# Altium PCB PCB1.PcbDoc
Units mm, origin at the board's own origin, x right, y up, seen from the top; angles counter-clockwise.
Board outline 118.33 x 69.3 mm, 2 copper layers (Top Layer, Bottom Layer); 36 components, 51 nets, 160 pads, 7 vias.
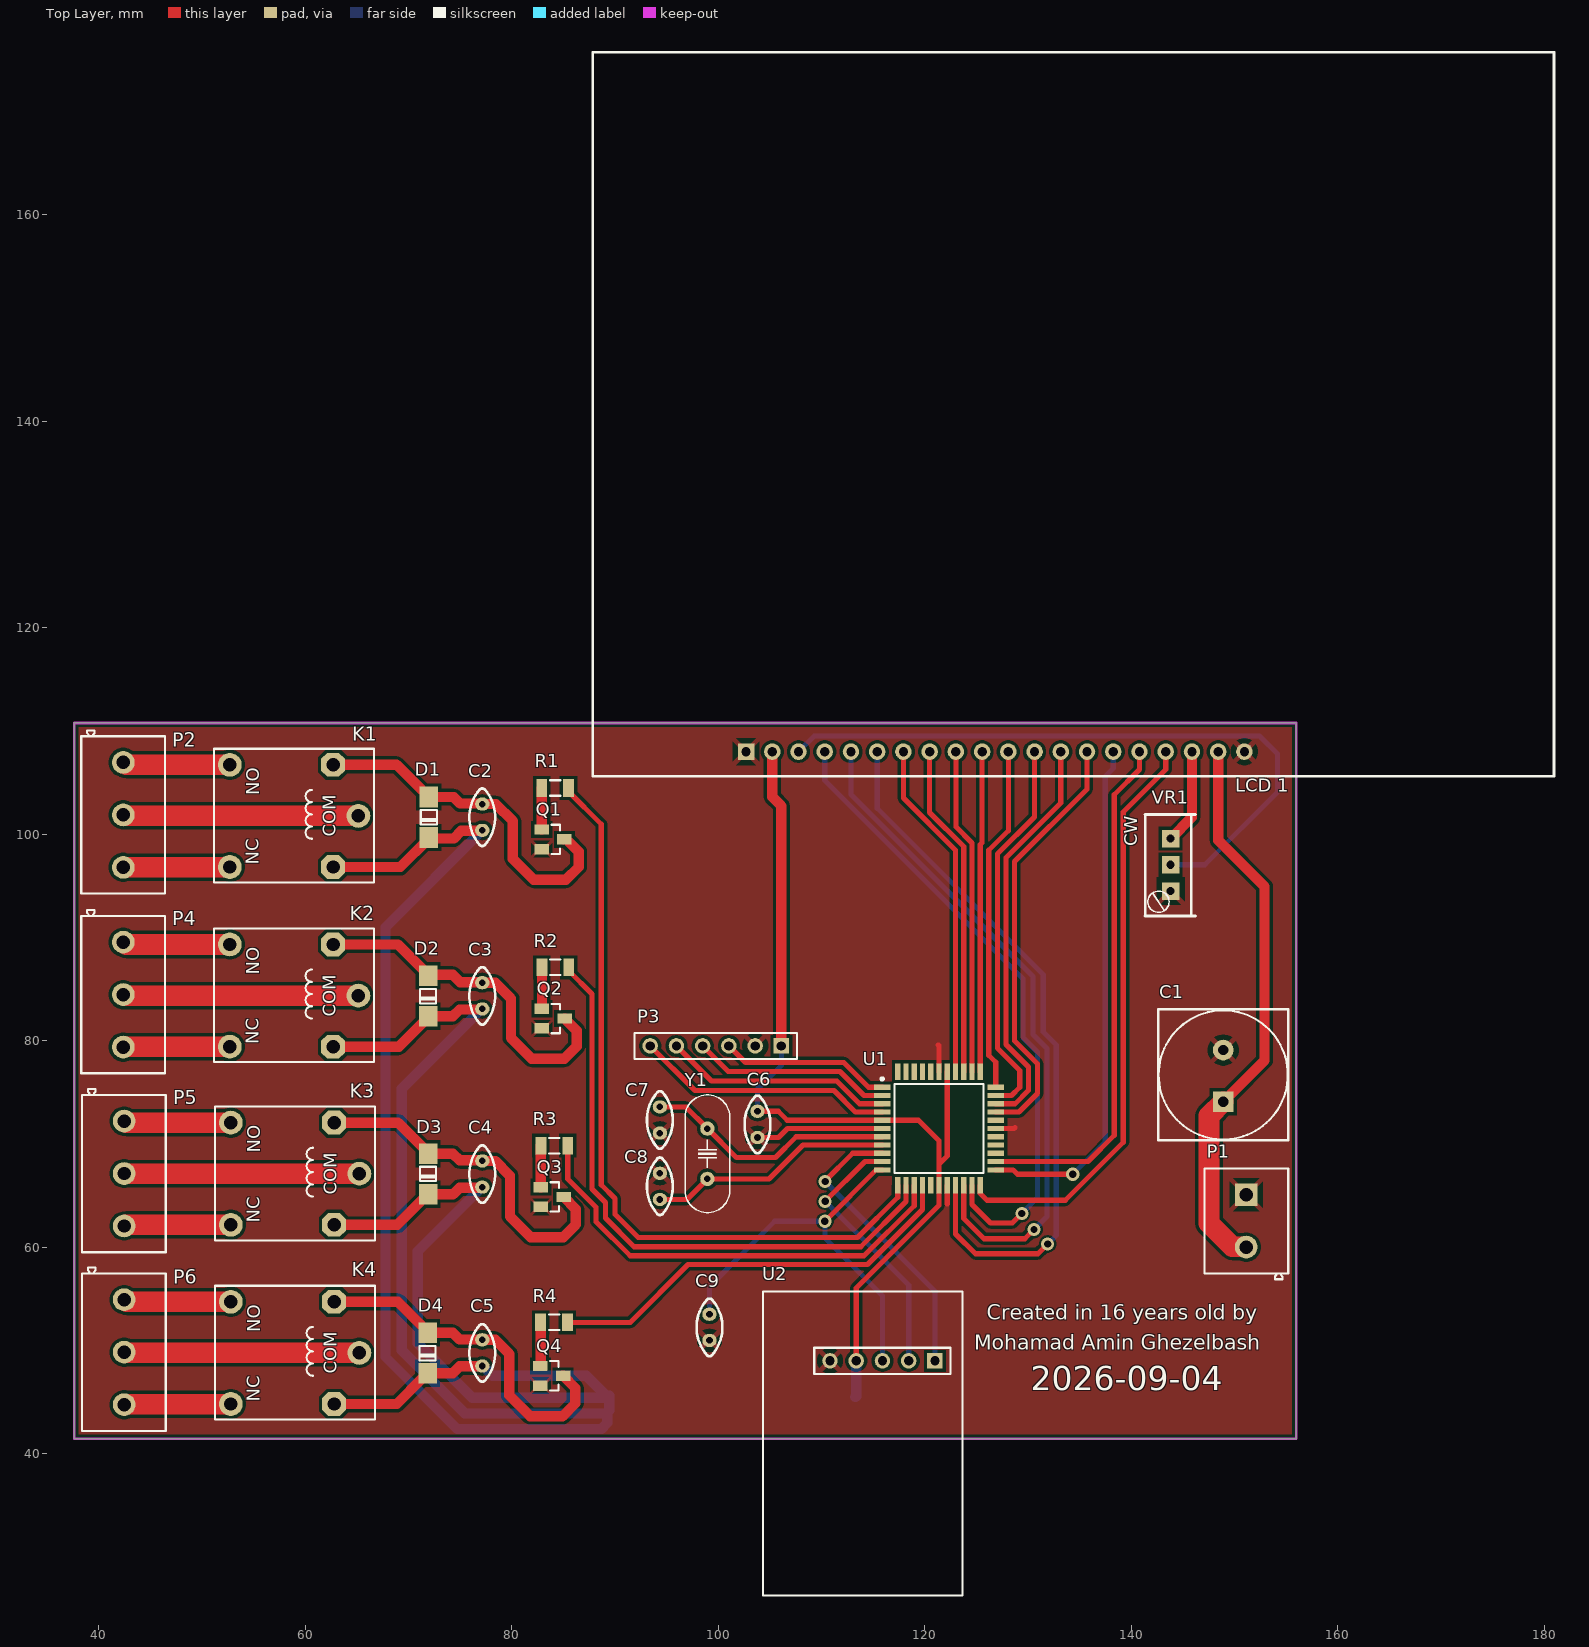
[diagram p0: Top Layer view]
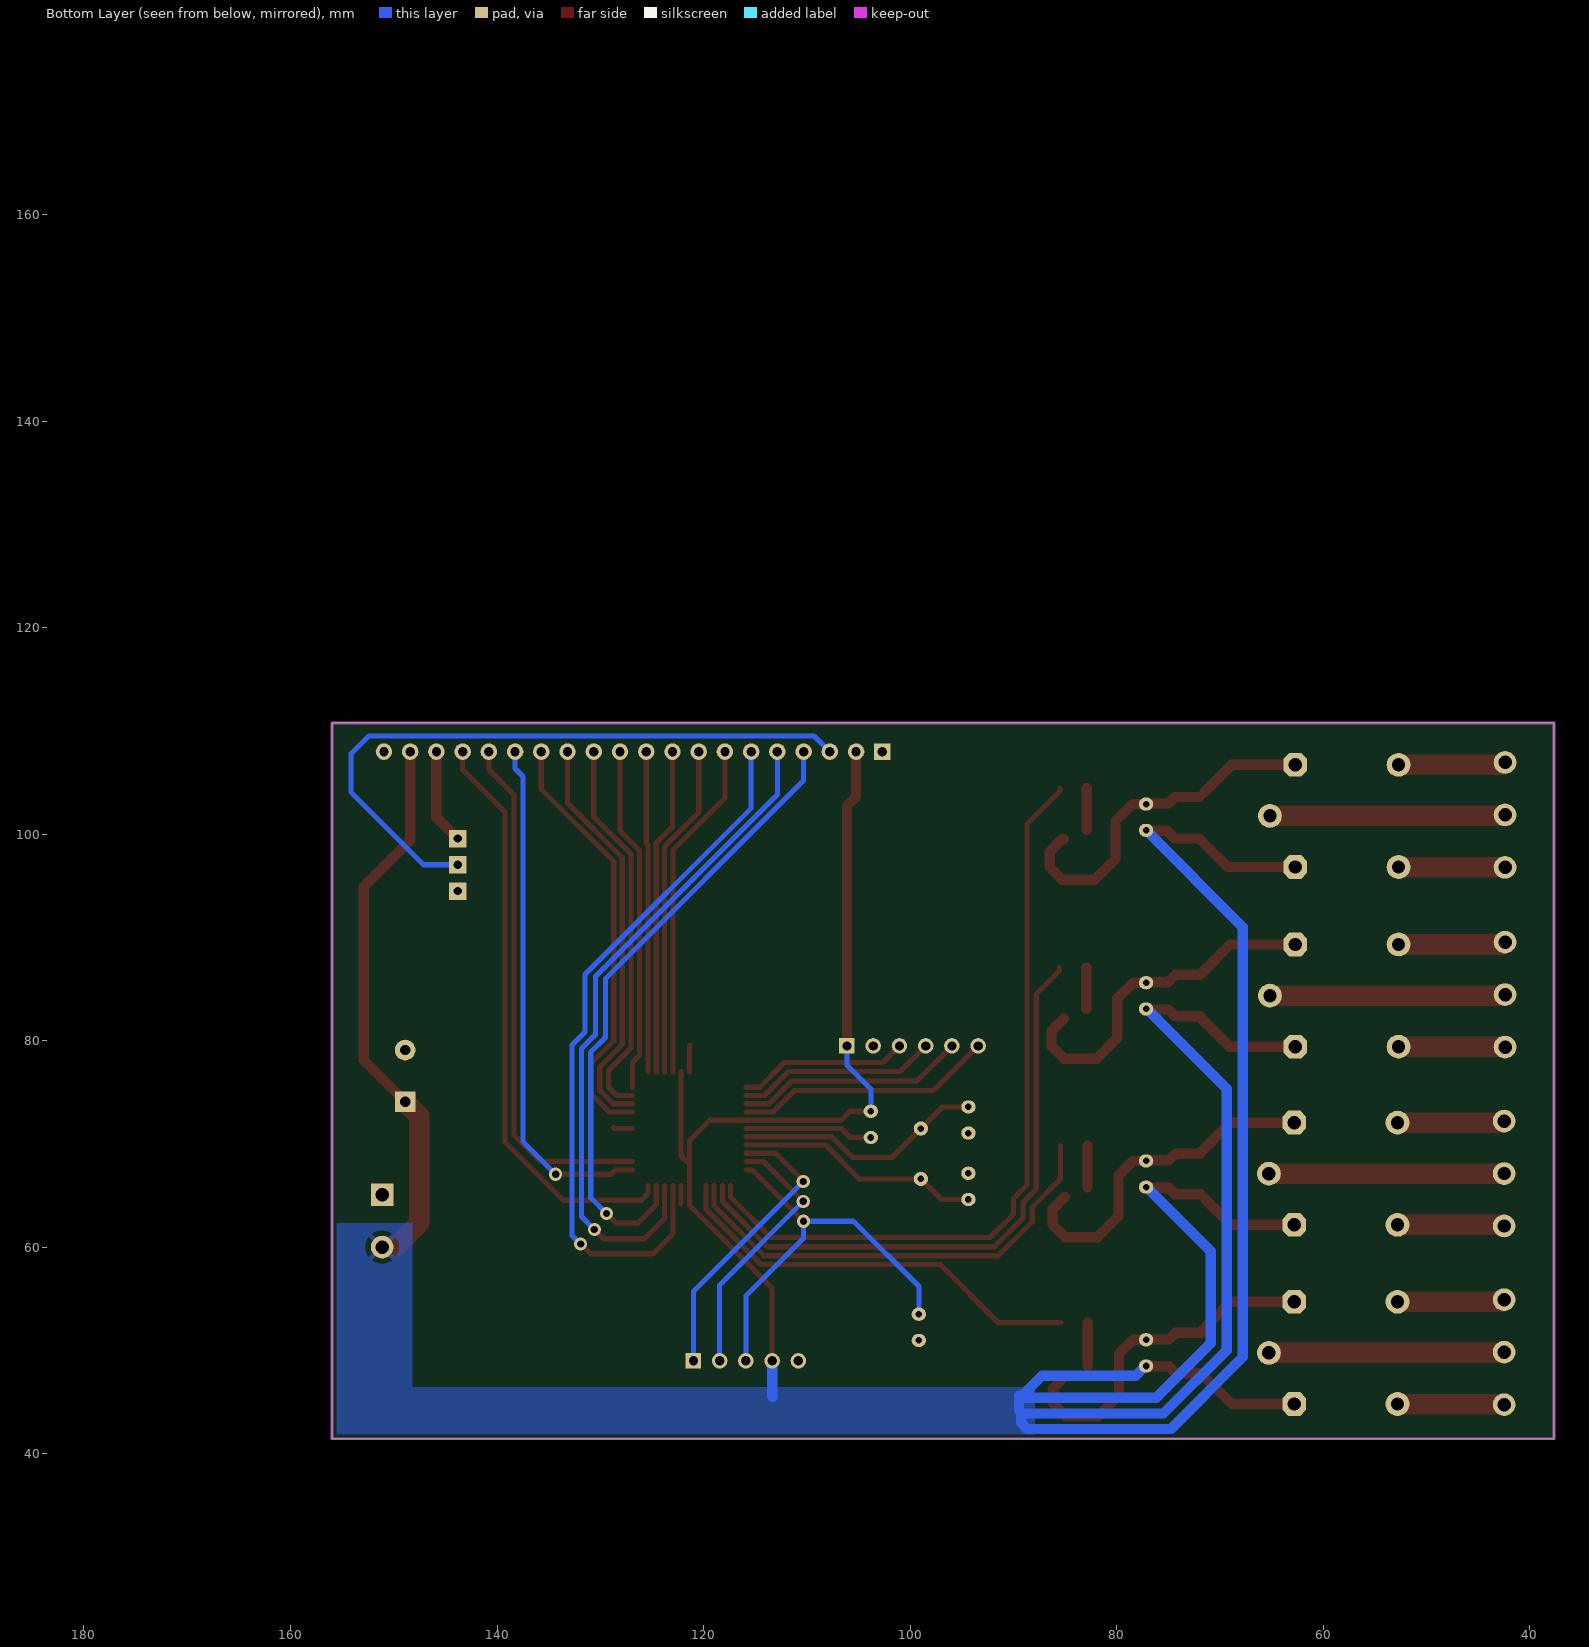
[diagram p1: Bottom Layer view, seen from below]

## Layer stack, top to bottom
Top Solder: solder mask 0.0102, Solder Resist, Dk 3.5
Top Layer: signal copper 0.0356
Dielectric 1: dielectric 0.32, FR-4, Dk 4.8
Bottom Layer: signal copper 0.0356
Bottom Solder: solder mask 0.0102, Solder Resist, Dk 3.5

## Board outline
37.65,41.475 37.65,110.775 155.975,110.775 155.975,41.475

## Design rules (kind name [scope] priority, off if disabled: settings)
Clearance [All] p1: gap=0.02 ignorepadtopadclearanceinfootprint=TRUE except(0.2: Via-Fill Via-Poly Via-Region; 0.3: Arc-Fill Arc-Poly Arc-Region Track-Fill Track-Poly Track-Region SMDPad-Fill SMDPad-Poly SMDPad-Region THPad-Fill THPad-Poly THPad-Region Fill-Fill Fill-Poly Fill-Region Poly-Poly Poly-Region Region-Region)
PolygonConnect [All] p1: thpad.connectstyle=Relief thpad.reliefconductorwidth=0.5 thpad.reliefentries=4 thpad.polygonreliefangle="45 Angle" thpad.airgapwidth=0.5 smdpad.connectstyle=Relief smdpad.reliefconductorwidth=0.3 smdpad.reliefentries=4 smdpad.polygonreliefangle="45 Angle" smdpad.airgapwidth=0.3 via.connectstyle=Relief via.reliefconductorwidth=0.3 via.reliefentries=4 via.polygonreliefangle="45 Angle" via.airgapwidth=0.3
RoutingVias [All] p1: holewidth=0.711 width=1.27 viastyle="Through Hole" minholewidth=0.711 minwidth=1.27 maxholewidth=0.711 maxwidth=1.27
SolderMaskExpansion [All] p1: expansion=0.102 istentingtop=FALSE
Width [All] p1: maxlimit=2 minlimit=0.5 preferedwidth=1
30 further rules are at their usual default settings.

## Classes and differential pairs
component class Sheet1: C1 C2 C3 C4 C5 C6 C7 C8 C9 D1 D2 D3 D4 K1 K2 K3 K4 "LCD 1" P1 P2 P3 P4 P5 P6 Q1 Q2 Q3 Q4 R1 R2 R3 U2 VR1 Y1

## Components (designator, comment, footprint, x,y, rotation, side; value= is the part's Value field where it differs from the comment)
C1 "10uF" "Cap 12.5x25-5" 154.663,66.957 r90 top
C2 "100nF" "Cap - 100nF" 77.15,101.65 r270 top
C3 "100nF" "Cap - 100nF" 77.15,84.35 r270 top
C4 "100nF" "Cap - 100nF" 77.15,67.095 r270 top
C5 "100nF" "Cap - 100nF" 77.15,49.775 r270 top
C6 "100nF" "Cap - 100nF" 103.8,71.9 r90 top
C7 "100nF" "Cap - 100nF" 94.35,72.33 r270 top
C8 "100nF" "Cap - 100nF" 94.35,65.9 r90 top
C9 "100nF" "Cap - 100nF" 99.15,52.25 r270 top
D1 "1n4007" "Diode 1N4007 SMD" 69.523,106.648 r270 top
D2 "1n4007" "Diode 1N4007 SMD" 69.448,89.343 r270 top
D3 "1n4007" "Diode 1N4007 SMD" 69.448,72.118 r270 top
D4 "1n4007" "Diode 1N4007 SMD" 69.398,54.773 r270 top
K1 "Relay 5V" "Relay 15.40x12.10x13.10" 220.79,-86.674 r90 top
K2 "Relay 5V" "Relay 15.40x12.10x13.10" 220.79,-104.074 r90 top
K3 "Relay 5V" "Relay 15.40x12.10x13.10" 220.89,-121.324 r90 top
K4 "Relay 5V" "Relay 15.40x12.10x13.10" 220.89,-138.674 r90 top
"LCD 1" "GLCD?" "LCD 128x64 graphic" 136.349,163.265 r0 top
P1 "2 PIN Phoenix MKDSN" "2 PIN Phoenix MKDSN" 151.76,60.147 r90 top
P2 "3 PIN Phoenix MKDSN" "3 PIN Phoenix MKDSN" 43.275,102.125 r270 top
P3 "M-Header 6" "M-Header 6" 100.141,79.627 r180 top
P4 "3 PIN Phoenix MKDSN" "3 PIN Phoenix MKDSN" 43.275,84.725 r270 top
P5 "3 PIN Phoenix MKDSN" "3 PIN Phoenix MKDSN" 43.364,67.399 r270 top
P6 "3 PIN Phoenix MKDSN" "3 PIN Phoenix MKDSN" 43.364,50.099 r270 top
Q1 "BC547" "BC547 SMD SOT-23" 83.8,99.5 r270 top
Q2 "BC547" "BC547 SMD SOT-23" 83.825,82.15 r270 top
Q3 "BC547" "BC547 SMD SOT-23" 83.725,64.875 r270 top
Q4 "BC547" "BC547 SMD SOT-23" 83.675,47.55 r270 top
R1 "Resistor" "Resistor_SMD_1206 (3216)" 84.2,104.475 r0 top value=2.2K
R2 "Resistor" "Resistor_SMD_1206 (3216)" 84.225,87.1 r0 top value=2.2K
R3 "Resistor" "Resistor_SMD_1206 (3216)" 84.125,69.85 r0 top value=2.2K
R4 "Resistor" "Resistor_SMD_1206 (3216)" 84.1,52.725 r0 top value=2.2K
U1 "ATmega32-16AC" 44A 121.375,71.5 r0 top
U2 "rotary encoder" "rotary encoder" 115.9,48.75 r0 top
VR1 "Multi Turn" "Multi Turn" 143.8,97.04 r90 top value=10K
Y1 "16.00000 MHz" "XTAL Small" 98.95,69.06 r90 top

## Footprints (in the part's own frame and the unit in brackets; to place one, negate y for a bottom-side part, rotate by r counter-clockwise, add the part's x,y. Pads: shape width x height; smd on the part's side, far side on the other; paste and mask are expansions set on the pad)
"2 PIN Phoenix MKDSN" [mm]
  round 2.2 hole 1.3: 1(-0.127,0.635)
  rect 2.2x2.2 hole 1.3: 2(4.953,0.635)
  silkscreen extent -3.24,-3.44 7.49,4.66, body extent -3.23,-3.42 7.5,4.68, height 10.03
"3 PIN Phoenix MKDSN" [mm]
  round 2.2 hole 1.3: 1(-4.826,-0.889) 2(0.254,-0.889) 3(5.334,-0.889)
  silkscreen extent -7.94,-4.96 7.87,3.14, body extent -7.94,-4.96 7.87,3.14, height 10.03
44A [mm] "QFP; 44 Leads; Body 10 x 10 mm; Pitch 0.8 mm"
  rect 1.6x0.5 smd: 1(-5.5,4) 2(-5.5,3.2) 3(-5.5,2.4) 4(-5.5,1.6) 5(-5.5,0.8) 6(-5.5,0) 7(-5.5,-0.8) 8(-5.5,-1.6) 9(-5.5,-2.4) 10(-5.5,-3.2) 11(-5.5,-4) 23(5.5,-4) 24(5.5,-3.2) 25(5.5,-2.4) 26(5.5,-1.6) 27(5.5,-0.8) 28(5.5,0) 29(5.5,0.8) 30(5.5,1.6) 31(5.5,2.4) 32(5.5,3.2) 33(5.5,4)
  rect 0.5x1.6 smd: 12(-4,-5.5) 13(-3.2,-5.5) 14(-2.4,-5.5) 15(-1.6,-5.5) 16(-0.8,-5.5) 17(0,-5.5) 18(0.8,-5.5) 19(1.6,-5.5) 20(2.4,-5.5) 21(3.2,-5.5) 22(4,-5.5) 34(4,5.5) 35(3.2,5.5) 36(2.4,5.5) 37(1.6,5.5) 38(0.8,5.5) 39(0,5.5) 40(-0.8,5.5) 41(-1.6,5.5) 42(-2.4,5.5) 43(-3.2,5.5) 44(-4,5.5)
  silkscreen extent -5.62,-4.3 4.3,4.92
"BC547 SMD SOT-23" [mm]
  rect 1x1.4 smd: 1(0.95,-0.9) 2(-0.95,-0.9) 3(0,1.3)
  silkscreen extent -1.42,0.05 1.42,0.86, body extent -1.45,-1 1.45,1.4, height 1.11
"Cap 12.5x25-5" [mm]
  rect 2x2 hole 1: 1(7.143,5.763)
  round 2 hole 1: 2(12.143,5.763)
  silkscreen extent 3.42,-0.54 16.09,12.06, body extent 3.39,-0.49 15.9,12.01, height 25.7
"Cap - 100nF" [mil]
  oval 50x55 hole 25: 1(-50,0) 2(50,0)
  silkscreen extent -110,-49 110,49, body extent -115,-34 115,33, height 272
"Diode 1N4007 SMD" [mm]
  rect 2x1.8 smd: 1(3.048,2.452) 2(6.968,2.452)
  silkscreen extent 4.32,1.64 5.71,3.28, body extent 2.51,1.09 7.51,3.79, height 2.16
"LCD 128x64 graphic" [mm]
  rect 1.6x1.6 hole 0.9: 1(-33.659,-55.265)
  round 1.6 hole 0.9: 2(-31.119,-55.265) 3(-28.579,-55.265) 4(-26.039,-55.265) 5(-23.499,-55.265) 6(-20.959,-55.265) 7(-18.419,-55.265) 8(-15.879,-55.265) 9(-13.339,-55.265) 10(-10.799,-55.265) 11(-8.259,-55.265) 12(-5.719,-55.265) 13(-3.179,-55.265) 14(-0.639,-55.265) 15(1.901,-55.265) 16(4.441,-55.265) 17(6.981,-55.265) 18(9.521,-55.265) 19(12.061,-55.265) 20(14.601,-55.265)
  silkscreen extent -48.51,-57.66 44.58,12.45, body extent -48.4,-57.61 44.6,12.39, height 18.5
"M-Header 6" [mm]
  rect 1.5x1.5 hole 0.9: 1(-5.969,0.127)
  round 1.5 hole 0.9: 2(-3.429,0.127) 3(-0.889,0.127) 4(1.651,0.127) 5(4.191,0.127) 6(6.731,0.127)
  silkscreen extent -7.49,-1.14 8.25,1.4, body extent -7.49,-1.12 8.25,1.38, height 5
"Multi Turn" [mm]
  rect 1.7x1.7 hole 0.8: 1(-2.54,0) 2(2.54,0) 3(0,0)
  silkscreen extent -4.94,-2.4 4.86,2.45, body extent -4.6,-2.41 4.6,2.39, height 11.96
"Relay 15.40x12.10x13.10" [mm]
  round 2.3 hole 1.3: 1(188.449,155.64) 2(183.499,168.09) 3(193.399,168.09)
  oct 2.3x2.3 hole 1.3: 4(183.499,158.09) 5(193.399,158.09)
  silkscreen extent 182,154.14 194.95,169.64, body extent 182.4,154.34 194.5,169.64, height 16.1
"Resistor_SMD_1206 (3216)" [mm]
  rect 1.05x1.7 smd: 1(-1.298,0) 2(1.298,0)
  silkscreen extent -0.5,-0.75 0.5,0.75, body extent -1.6,-0.8 1.6,0.8, height 0.55
"rotary encoder" [mm]
  rect 1.5x1.5 hole 0.9: 1(5.08,0.254)
  round 1.5 hole 0.9: 2(2.54,0.254) 3(0,0.254) 4(-2.54,0.254) 5(-5.08,0.254)
  silkscreen extent -11.56,-22.48 7.75,6.98, body extent -11.57,-22.5 7.76,7.06, height 30
"XTAL Small" [mil]
  round 55 hole 25: 1(-96.06,0) 2(96.06,0)
  silkscreen extent -225,-85 225,85, body extent -226,-89 226,89, height 140

## Part data
C1: library part "Capacitor DIP", "Capacitor DIP"
C2 C3 C4 C5 C6 C7 C8 C9: library part Cap-Bipolar, "Bipolar Capacitor", Voltage=100V, Adding Date=1387/12/20, Designer="Saeid Jorablo", Organazation=ControTec
D1 D2 D3 D4: library part "Diode 1n4007", "Diode 1n4007"
K1 K2 K3 K4: library part "Relay 15.40x12.10x13.10"
"LCD 1": library part "LCD 128x64 graphic"
U1: "8-Bit AVR Microcontroller with 32K Bytes of In-System Programmable Flash Memory", Package Information="Latest Revision: 1995", Package Reference=44A, Datasheet="Latest Revision: 2503C-AVR-10/02", Published=17-Sep-2003, Publisher="Altium Limited", Revision="17-Dec-2003: PCB Footprint updated"
Y1: library part XTAL, "XTAL Crystal", Company=E.P.I.L, Design Date=11/04/2011
R1 R2 R3 R4: Email=razi.vesali@gmail.com, LatestRevisionNote="Re-released for puplic", Published=17-Jun-2016, Publisher="Seyed Razi Vesali"
VR1: Email=Razi.vesali@gmail.com, LatestRevisionDate=17-Jul-2016, LatestRevisionNote="Re-released for Puplic", Publisher="Seyed Razi vesali (SRV)"

## Via types
v1: diameter 1.27, hole 0.711, Top Layer to Bottom Layer, 7 vias

## Nets (pads, with @x,y where several pads share a name; then routed paths per layer and width w, separated by ;. In a path a pad name is that pad's centre, name@x,y a point inside that pad or via, vN(x,y) a via of type N, cw(c..) or ccw(c..) an arc to the next point about the centre after c; other vN are vias at no path point)
GND: "LCD 1.1" "LCD 1.20" C1.2 C6.1 C7.2 C8.2 C9.2 P1.2 P3.2 Q1.1 Q2.1 Q3.1 Q4.1 U1.6 U1.18 U1.28 U1.39 U2.5 VR1.1 | length 18.8
  Top Layer w0.5: C6.1 105.83,70.63 106.7,71.5 U1.6 ; 121.3,79.6 121.375,79.525 U1.39 ; 122.175,64.225 U1.18 ; U1.28 128.65,71.5 128.75,71.6
NetC2_1: C2.1 D1.1 K1.5 Q1.3 | length 33.7
  Top Layer w1: K1.5 68.85,106.725 D1.1@71.475,104.1 ; D1.1 74.375,103.6 75.003,102.972 77.098,102.972 C2.1 78.469,102.92 80.1,101.289 80.1,97.625 82.125,95.6 85.25,95.6 86.475,96.825 86.475,98.325 85.3,99.5 Q1.3
NetC3_1: C3.1 D2.1 K2.5 Q2.3 | length 34.1
  Top Layer w1: K2.5 68.97,89.325 71.9,86.395 74.3,86.395 75.023,85.672 77.098,85.672 C3.1 78.405,85.62 79.925,84.1 79.925,80.275 81.95,78.25 85.075,78.25 86.3,79.475 86.3,80.975 Q2.3
NetC4_1: C4.1 D3.1 K3.5 Q3.3 | length 34
  Top Layer w1: K3.5 68.995,72.075 71.9,69.17 D3.1 74.304,69.07 74.958,68.417 77.098,68.417 C4.1 78.405,68.365 79.825,66.945 79.825,63 81.85,60.975 84.975,60.975 86.2,62.2 86.2,63.7 Q3.3
NetC5_1: C5.1 D4.1 K4.5 Q4.3 | length 34
  Top Layer w1: K4.5 68.95,54.725 71.85,51.825 D4.1 74.292,51.725 74.951,51.065 77.13,51.065 C5.1 78.405,51.045 79.775,49.675 79.775,45.675 81.8,43.65 84.925,43.65 86.15,44.875 86.15,46.375 Q4.3
NetC7_1: C7.1 U1.7 Y1.2 | length 24.4
  Top Layer w0.5: C7.1 96.85,73.6 Y1.2 101.75,68.7 105.55,68.7 107.55,70.7 U1.7
NetC8_1: C8.1 U1.8 Y1.1 | length 23.7
  Top Layer w0.5: C8.1 96.96,64.63 Y1.1 104.92,66.62 108.2,69.9 U1.8
NetC9_1: C9.1 U1.11 U2.3 | length 39.9
  Top Layer w0.5: v1(110.325,62.525) 115.3,67.5 U1.11
  Bottom Layer w0.5: C9.1 99.15,56.2 105.475,62.525 v1(110.325,62.525) 110.325,60.875 115.9,55.3 U2.3
NetK1_1: K1.1 P2.2 | length 22.8
  Top Layer w2: P2.2 42.44,101.871 42.536,101.775 K1.1
NetK1_2: K1.2 P2.3 | length 10.3
  Top Layer w2: P2.3 42.403,96.808 52.683,96.808 K1.2
NetK1_3: K1.3 P2.1 | length 10.4
  Top Layer w2: P2.1 42.44,106.951 42.666,106.725 K1.3
NetK2_1: K2.1 P4.2 | length 22.8
  Top Layer w2: P4.2 42.44,84.471 42.536,84.375 K2.1
NetK2_2: K2.2 P4.3 | length 10.3
  Top Layer w2: P4.3 42.403,79.408 52.683,79.408 K2.2
NetK2_3: K2.3 P4.1 | length 10.4
  Top Layer w2: P4.1 42.44,89.551 42.666,89.325 K2.3
NetK3_1: K3.1 P5.2 | length 22.8
  Top Layer w2: P5.2 42.485,67.135 65.24,67.135 K3.1
NetK3_2: K3.2 P5.3 | length 10.4
  Top Layer w2: P5.3 42.529,62.065 42.639,62.175 K3.2
NetK3_3: K3.3 P5.1 | length 10.4
  Top Layer w2: P5.1 42.529,72.225 42.679,72.075 K3.3
NetK4_1: K4.1 P6.2 | length 22.8
  Top Layer w2: P6.2 42.529,49.845 42.599,49.775 K4.1
NetK4_2: K4.2 P6.3 | length 10.3
  Top Layer w2: P6.3 42.505,44.795 52.77,44.795 K4.2
NetK4_3: K4.3 P6.1 | length 10.4
  Top Layer w2: P6.1 42.529,54.925 42.729,54.725 K4.3
"NetLCD 1_3": "LCD 1.3" VR1.3 | length 64.7
  Bottom Layer w0.5: 107.77,108 109.295,109.525 152.425,109.525 154.15,107.8 154.15,104.075 147.115,97.04 VR1.3
"NetLCD 1_4": "LCD 1.4" U1.21 | length 61.7
  Top Layer w0.5: U1.21 124.575,64.15 126.375,62.35 128.475,62.35 v1(129.4,63.275)
  Bottom Layer w0.5: 110.31,108 110.31,105.19 129.5,86 129.5,80.325 130.925,78.9 130.925,64.8 v1(129.4,63.275)
"NetLCD 1_5": "LCD 1.5" U1.20 | length 65.9
  Top Layer w0.5: U1.20 123.775,62.775 125.725,60.825 129.675,60.825 v1(130.575,61.725)
  Bottom Layer w0.5: 112.85,108 112.85,103.85 130.475,86.225 130.475,80.6 131.825,79.25 131.825,62.975 v1(130.575,61.725)
"NetLCD 1_6": "LCD 1.6" U1.19 | length 70
  Top Layer w0.5: U1.19 122.975,61.3 124.9,59.375 130.95,59.375 v1(131.9,60.325)
  Bottom Layer w0.5: 115.39,108 115.39,102.51 131.475,86.425 131.475,80.85 132.725,79.6 132.725,61.15 v1(131.9,60.325)
"NetLCD 1_7": "LCD 1.7" U1.37 | length 33.1
  Top Layer w0.5: 117.93,108 117.93,103.495 122.975,98.45 U1.37
"NetLCD 1_8": "LCD 1.8" U1.36 | length 32.4
  Top Layer w0.5: 120.47,108 120.47,102.105 123.775,98.8 U1.36
"NetLCD 1_9": "LCD 1.9" U1.35 | length 31.6
  Top Layer w0.5: 123.01,108 123.01,100.715 124.575,99.15 U1.35
"NetLCD 1_10": "LCD 1.10" U1.34 | length 31.1
  Top Layer w0.5: U1.34 125.375,99 125.55,99.175 125.55,108
"NetLCD 1_11": "LCD 1.11" U1.33 | length 33.6
  Top Layer w0.5: U1.33 126.875,77.925 126.2,78.6 126.2,98.45 128.09,100.34 128.09,108
"NetLCD 1_12": "LCD 1.12" U1.32 | length 37.6
  Top Layer w0.5: U1.32 128.4,74.7 129.2,75.5 129.2,77.125 127.025,79.3 127.025,98.075 130.63,101.68 130.63,108
"NetLCD 1_13": "LCD 1.13" U1.31 | length 39.6
  Top Layer w0.5: U1.31 128.75,73.9 130.05,75.2 130.05,77.45 127.875,79.625 127.875,97.725 133.17,103.02 133.17,108
"NetLCD 1_14": "LCD 1.14" U1.30 | length 41.7
  Top Layer w0.5: U1.30 129.125,73.1 130.925,74.9 130.925,77.775 128.7,80 128.7,97.35 135.71,104.36 135.71,108
"NetLCD 1_15": "LCD 1.15" U1.23 | length 50.2
  Top Layer w0.5: U1.23 128.55,67.5 128.975,67.075 v1(134.325,67.075)
  Bottom Layer w0.5: v1(134.325,67.075) 137.475,70.225 137.475,105.6 138.25,106.375 138.25,108
"NetLCD 1_16": "LCD 1.16" U1.24 | length 50.7
  Top Layer w0.5: U1.24 135.8,68.3 138.35,70.85 138.35,103.825 140.79,106.265 140.79,108
"NetLCD 1_17": "LCD 1.17" U1.22 | length 56.8
  Top Layer w0.5: U1.22 125.375,65.2 126.025,64.55 133.6,64.55 139.225,70.175 139.225,102.16 143.33,106.265 143.33,108
"NetLCD 1_18": "LCD 1.18" VR1.2 | length 9.3
  Top Layer w1: VR1.2 145.87,101.65 145.87,108
NetP3_3: P3.3 U1.1 | length 16.5
  Top Layer w0.5: P3.3 102.63,77.9 112.15,77.9 114.55,75.5 U1.1
NetP3_4: P3.4 U1.2 | length 19.4
  Top Layer w0.5: P3.4 100.965,77.025 111.775,77.025 114.1,74.7 U1.2
NetP3_5: P3.5 U1.3 | length 22.2
  Top Layer w0.5: P3.5 99.35,76.1 111.475,76.1 113.675,73.9 U1.3
NetP3_6: P3.6 U1.4 | length 25.1
  Top Layer w0.5: P3.6 97.735,75.175 111.2,75.175 113.275,73.1 U1.4
NetQ1_2: Q1.2 R1.1 | length 4
  Top Layer w1: Q1.2 82.901,104.474 R1.1
NetQ2_2: Q2.2 R2.1 | length 4
  Top Layer w1: Q2.2 R2.1 R2.1
NetQ3_2: Q3.2 R3.1 | length 4
  Top Layer w1: Q3.2@82.826,65.825 R3.1 R3.1
NetQ4_2: Q4.2 R4.1 | length 4.3
  Top Layer w1: Q4.2 82.802,48.5 R4.1
NetR1_2: R1.2 U1.12 | length 74.2
  Top Layer w0.5: R1.2 85.498,104.15 88.675,100.973 88.675,66.05 90,64.725 90,63.2 92.25,60.95 113.475,60.95 117.375,64.85 U1.12
NetR2_2: R2.2 U1.13 | length 59.4
  Top Layer w0.5: R2.2 85.523,86.775 87.775,84.523 87.775,65.65 89.075,64.35 89.075,62.825 91.85,60.05 113.8,60.05 118.175,64.425 U1.13
NetR3_2: R3.2 U1.14 | length 44.7
  Top Layer w0.5: R3.2 85.423,66.627 88.175,63.875 88.175,62.475 91.475,59.175 114.125,59.175 118.975,64.025 U1.14
NetR4_2: R4.2 U1.15 | length 41.3
  Top Layer w0.5: R4.2 91.475,52.725 97.075,58.325 114.45,58.325 119.775,63.65 U1.15
NetU1_9: U1.9 U2.1 | length 28.5
  Top Layer w0.5: v1(110.35,66.375) 110.35,66.425 113.025,69.1 U1.9
  Bottom Layer w0.5: v1(110.35,66.375) 120.98,55.745 U2.1
NetU1_10: U1.10 U2.2 | length 25.9
  Top Layer w0.5: v1(110.35,64.45) 114.2,68.3 U1.10
  Bottom Layer w0.5: v1(110.35,64.45) 118.44,56.36 U2.2
VCC: "LCD 1.2" "LCD 1.19" C1.1 C2.2 C3.2 C4.2 C5.2 C6.2 D1.2 D2.2 D3.2 D4.2 K1.4 K2.4 K3.4 K4.4 P1.1 P3.1 U1.5 U1.17 U1.38 U2.4 | length 401.7
  Top Layer w0.5: C6.2 105.805,73.17 106.675,72.3 U1.5 119.4,72.3 121.375,70.325 121.375,68.05 ; U2.4 113.36,56.06 121.375,64.075 U1.17 121.375,68.05 ; U1.38 122.175,68.85 121.375,68.05
  Top Layer w1: K2.4 69.05,79.425 71.9,82.275 D2.2 74.304,82.375 74.958,83.028 77.098,83.028 C3.2 ; K1.4 69.22,96.825 71.975,99.58 74.375,99.58 75.123,100.328 77.098,100.328 C2.2 ; K4.4 68.87,44.825 D4.2@71.35,47.305 ; K3.4 68.925,62.175 D3.2@71.4,64.65 ; D4.2 74.282,47.805 74.951,48.475 77.12,48.475 C5.2 ; D3.2 74.319,65.15 74.951,65.782 77.107,65.782 C4.2 ; 105.23,108 105.23,103.62 106.11,102.74 P3.1 ; 148.41,108 148.41,99.415 152.9,94.925 152.9,78.1 C1.1
  Top Layer w2: C1.1 147.525,72.725 147.525,62.325 149.792,60.058 151.087,60.058 P1.1
  Bottom Layer w0.5: C6.2 103.8,75.325 106.11,77.635 P3.1
  Bottom Layer w1: C5.2 77.238,48.417 77.302,48.417 78.169,47.55 87.225,47.55 89.15,45.625 ; C4.2 77.086,65.825 70.9,59.639 70.9,50.7 76.175,45.425 89.25,45.425 89.45,45.625 89.45,44.2 89.25,44 ; C3.2 77.087,83.08 69.35,75.343 69.35,50.025 75.463,43.912 89.162,43.912 89.25,44 ; C2.2 67.775,91.005 67.775,49.375 74.75,42.4 88.664,42.4 89.25,42.986 89.25,44 ; 113.275,45.5 113.36,45.585 U2.4@113.36,48.997 ; U2.4 U2.4@113.367,48.997
pads on no net: U1.16 U1.25 U1.26 U1.27 U1.29 U1.40 U1.41 U1.42 U1.43 U1.44

## Polygon pours and split planes (outlines as drawn)
GND on Top Layer "GND_L01_P000" (solid, remove dead copper, pour order 0): 155.975,41.475 155.975,110.775 37.65,110.775 37.65,41.475
VCC on Bottom Layer "VCC_L02_P001" (solid, pour order 1): 87.95,41.4 87.95,46.425 148.225,46.425 148.225,62.35 155.975,62.35 155.975,41.4

## Keep-outs
Keep-Out Layer:
  the board outline again, w0.254

## Silkscreen, mask and mechanical layers (free items; w line width, h text height)
Top Overlay:
  text "Created in 16 years old by" at 126,52.497 h2.5
  text "Mohamad Amin Ghezelbash" at 124.775,49.605 h2.5
  text "2026-09-04" at 130.25,45.373 h4

## Text inside footprints (layer, text, board x,y; h text height)
K1: Top Overlay "COM" at 63.372,99.743 h2.2 r90; Top Overlay "NO" at 55.981,103.782 h2.2 r90; Top Overlay "NC" at 55.93,97.051 h2.2 r90
K2: Top Overlay "COM" at 63.372,82.343 h2.2 r90; Top Overlay "NO" at 55.981,86.382 h2.2 r90; Top Overlay "NC" at 55.93,79.651 h2.2 r90
K3: Top Overlay "COM" at 63.472,65.093 h2.2 r90; Top Overlay "NO" at 56.081,69.132 h2.2 r90; Top Overlay "NC" at 56.03,62.401 h2.2 r90
K4: Top Overlay "COM" at 63.472,47.743 h2.2 r90; Top Overlay "NO" at 56.081,51.782 h2.2 r90; Top Overlay "NC" at 56.03,45.051 h2.2 r90
VR1: Top Overlay "CW" at 141,98.85 h2.2 r90